# Altium PCB Balancing_Robot_1_1.PcbDoc (part 3 of 3)
Units mm, origin at the board's own origin, x right, y up, seen from the top; angles counter-clockwise.
Board outline 27 x 60 mm, 6 copper layers (Top Layer, Int1 (GND), Int2 (Sign), Int3 (Sign), Int4 (PWR), Bottom Layer), stack 1.571 mm thick; 139 components, 119 nets, 602 pads, 326 vias.
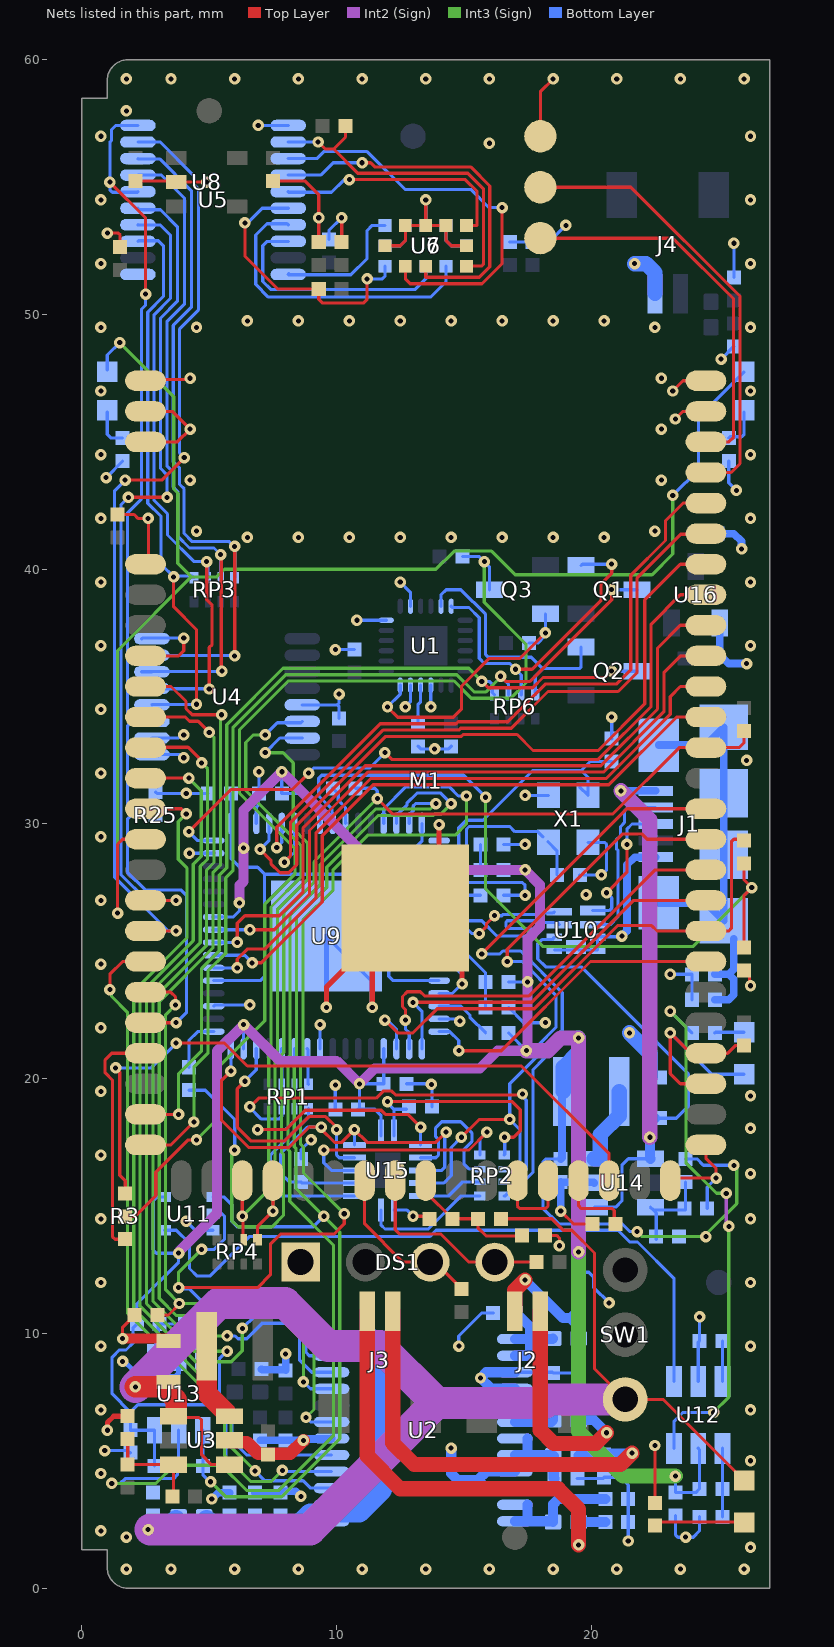
[diagram p6: the nets of this part, all layers, seen from the top]

## Via types
v1: diameter 0.45, hole 0.2, Top Layer to Bottom Layer, tented both sides, 326 vias

## Nets (pads, with @x,y where several pads share a name; then routed paths per layer and width w, separated by ;. In a path a pad name is that pad's centre, name@x,y a point inside that pad or via, vN(x,y) a via of type N, cw(c..) or ccw(c..) an arc to the next point about the centre after c; other vN are vias at no path point) (continued)
DEBUG_CTS: M1.47 U9.18 | length 16.3
  Top Layer w0.125: v1(12.7,22.3) 12.7,22.717 12.587,22.829 12.587,23.227 12.773,23.413 13.287,23.413 13.45,23.25 17.56,23.25 22.51,28.2 M1.47@24.5,28.2
  Bottom Layer w0.125: v1(12.7,22.3) 12.7,21.95 12.85,21.8 U9.18@12.85,21.175
DEBUG_RTS: M1.45 R14.1 U9.19 | length 21.1
  Top Layer w0.125: v1(11.9,22.3) 12.4,21.8 13,21.8 13.95,22.75 17.767,22.75 21.029,26.013 22.367,26.013 22.579,25.8 M1.45@24.5,25.8 25.4,25.8 25.5,25.9 25.5,29.3 25.6,29.4 25.95,29.4 R14.1@26,29.35 R14.1@26,29.4
  Bottom Layer w0.125: v1(11.9,22.3) 12,22.3 12.35,21.95 U9.19@12.35,21.175
DEBUG_RXD: M1.44 U9.16 | length 12.5
  Top Layer w0.125: v1(14.8,21.1) 16.47,21.1 19.97,24.6 M1.44@24.5,24.6
  Bottom Layer w0.125: U9.16@14.025,21.85 14.45,21.85 14.8,21.5 v1(14.8,21.1)
DEBUG_TXD: M1.46 U9.17 | length 15.1
  Top Layer w0.125: v1(13,23) 17.663,23 21.663,27 M1.46@24.5,27
  Bottom Layer w0.125: v1(13,23) 13.35,22.65 U9.17@13.35,21.175
F_3V3: C23.2 C24.2 C25.2 C32.2 C33.2 C34.2 C35.2 L2.2 L3.2 L4.2 R7.1 R11.1 R12.1 R13.1 R17.1 R22.1 U9.20 U9.31 U9.42 U9.50 U9.56 U11.5 U12.5 U13.6 U15.14 | length 128.1
  Int2 (Sign) w0.4: v1(3.8,13.15) 3.8,13.2 5.3,14.7 5.3,21.075 v1(6.35,22.125) 7.775,20.7 10,20.7 v1(10.9,19.8) 11.5,20.4 15.618,20.4 16.318,21.1 v1(17.45,21.1) 17.45,21.114 17.5,21.164 v1(17.5,23.8) 17.5,25.473 17.983,25.957 17.983,27.617 v1(17.4,28.2) 11.7,28.2 v1(7.85,32.05) 6.35,30.55 v1(6.35,29.05) 6.35,27.75 6.193,27.593 6.193,26.91 v1(6.183,26.9)
  Int2 (Sign) w0.6: v1(17.45,21.1) 18.3,21.1 18.8,21.6 v1(19.5,21.6) v1(19.5,13.2)
  Int3 (Sign) w0.125: v1(21.8,14) 22,13.8 v1(24.5,13.8) 24.5,13.883 25.713,15.096 25.713,16.487 v1(25.6,16.6)
  Int3 (Sign) w0.6: v1(19.5,13.2) 19.5,6.15 21.25,4.4 v1(23.3,4.4)
  Bottom Layer w0.125: R12.1@2.85,4.8 U13.6@2.85,6.2 1.922,6.2 C25.2@1.906,6.216 1.906,6.906 ; U11.5@3.25,15.35 2.95,15.35 2.8,15.2 2.8,13.275 2.925,13.15 v1(3.8,13.15) 3.8,12.8 2.156,11.156 R11.1@2.156,10.366 2.012,10.222 2.012,9.629 1.733,9.35 1.467,9.35 1.187,9.071 1.187,7.625 1.906,6.906 ; U9.42@5.15,26.35 U9.42@5.175,26.35 5.95,26.35 6.183,26.583 v1(6.183,26.9) ; R13.1@5.65,4.8 5.65,6.75 5.2,7.2 2.2,7.2 1.906,6.906 ; U9.31@6.35,21.175 v1(6.35,22.125) ; v1(6.35,29.05) U9.50@6.35,30.025 ; v1(7.85,32.05) C33.2@7.85,31.2 8.7,31.2 9.35,30.55 U9.56@9.35,30.025 ; U15.14@11.75,17.75 U15.14@11.75,17.95 11.75,18.55 11.5,18.8 C35.2@10.85,18.8 10.9,18.85 v1(10.9,19.8) C32.2@11.85,19.8 U9.20@11.85,21.175 ; L2.2@16.55,28.2 v1(17.4,28.2) ; R7.1@16.75,21.8 v1(17.45,21.1) ; L3.2@16.75,23.8 v1(17.5,23.8) ; C24.2@18.8,16.85 18.223,16.85 18.1,16.727 18.1,14.917 18.717,14.3 21.204,14.3 21.504,14 v1(21.8,14) ; v1(23.3,4.4) C34.2@23.3,3.75 24.1,3.75 R17.1@24.25,3.9 24.25,5.44 U12.5@24.2,5.49 ; C23.2@23.45,13.8 v1(24.5,13.8) ; R22.1@23.7,16.85 24.15,16.85 24.4,16.6 v1(25.6,16.6)
  Bottom Layer w0.3: C24.2@18.8,16.85 18.85,16.9 18.85,19.45 L4.2@18.9,19.5
  Bottom Layer w0.6: L4.2@18.9,19.5 18.9,20.45 19.5,21.05 v1(19.5,21.6)
FT_EECLK: R13.2 U9.62 U11.1 U13.4 | length 46.5
  Int3 (Sign) w0.125: v1(5.056,4.175) 5.644,3.587 7.841,3.587 10.125,5.871 10.125,13.975 v1(9.5,14.6) 8.413,15.687 8.413,17.251 8.337,17.326 8.337,20.73 8.427,20.82 8.427,26.327 9.613,27.513 9.613,28.305 11.645,30.337 13.804,30.337 13.854,30.388 14.088,30.388 v1(14.5,30.8)
  Bottom Layer w0.125: U13.4@4.75,6.2 R13.2@4.75,4.8 4.75,4.45 5.025,4.175 v1(5.056,4.175) ; U11.1@5.15,15.35 5.587,15.35 5.887,15.05 5.887,14.4 6.1,14.187 9.087,14.187 v1(9.5,14.6) ; U9.62@12.35,30.025 12.35,30.325 12.762,30.737 12.762,30.815 13.159,31.213 14.087,31.213 14.483,30.817 14.483,30.8 v1(14.5,30.8)
FT_EECS: R12.2 U9.63 U13.5 | length 45.8
  Int3 (Sign) w0.125: v1(1.175,4.112) 2.912,4.112 3.625,4.825 5.478,4.825 6.466,3.837 7.737,3.837 9.875,5.975 9.875,13.471 8.163,15.184 8.163,17.147 8.087,17.222 8.087,20.834 8.177,20.923 8.177,26.43 9.363,27.616 9.363,28.409 11.541,30.587 13.687,30.587 v1(13.9,30.8)
  Bottom Layer w0.125: v1(1.175,4.112) 1.512,4.112 1.7,4.3 3.6,4.3 3.75,4.45 R12.2@3.75,4.8 3.8,4.8 3.9,4.9 3.8,5 U13.5@3.8,6.2 ; U9.63@12.85,30.025 12.85,30.359 13.012,30.52 13.012,30.712 13.1,30.8 v1(13.9,30.8)
FT_EEDATA: R10.2 U9.61 U11.2 U13.3 | length 42.5
  Top Layer w0.125: v1(3.8,11.8) 6.9,11.8 7.4,12.3 7.4,13.5 7.8,13.9 9.9,13.9 10.3,14.3 v1(10.3,14.7)
  Int3 (Sign) w0.125: v1(3.8,11.8) 3.8,12.4 v1(4.7,13.3) ; v1(10.3,14.7) 8.7,16.3 8.7,17.317 8.587,17.429 8.587,20.627 8.677,20.716 8.677,26.223 9.863,27.409 9.863,28.202 11.223,29.563 14.663,29.563 15.1,30 v1(15.1,31.1)
  Bottom Layer w0.125: v1(3.8,11.8) 3.852,11.748 4.213,11.748 4.956,11.004 R10.2@4.956,10.366 ; v1(4.7,13.3) 5.2,13.3 5.6,13.7 5.6,14.6 5.5,14.7 U11.2@5.15,14.7 ; U13.3@4.75,9.05 4.9,9.2 R10.2@4.9,10.222 ; U9.61@11.85,30.025 11.85,30.59 12.722,31.463 14.421,31.463 14.783,31.1 v1(15.1,31.1)
FT_RESET: R7.2 U9.14 | length 2.3
  Bottom Layer w0.125: U9.14@14.025,22.85 14.885,22.85 15.235,22.5 15.235,22.415 R7.2@15.85,21.8
GND: 1.1 C1.1 C2.1 C3.1 C4.1 C5.1 C6.1 C7.1 C8.1 C9.1 C10.1 C11.1 C12.1 C13.1 C14.1 C15.1 C16.1 C17.1 C18.1 C20.1 C21.1 C22.1 C24.1 C25.1 C26.1 C27.1 C28.1 C29.1 C30.1 C31.1 C32.1 C33.1 C34.1 C35.1 C36.1 C37.1 C38.1 C39.1 C40.1 C41.1 C42.1 C43.1 C44.1 C45.1 C46.1 C47.1 C48.1 C49.1 C50.1 C51.1 C52.1 D2.1 DS1.1 J1.5 J4.1 M1.1 M1.4 M1.37 M1.38 M1.40 M1.41 M1.62 M1.63 M1.64 M1.65 M1.66 M1.67 R2.2 R5.2 R8.2 R9.2 R15.2 R16.2 R18.2 R20.2 R21.2 R23.2 R25.1 R28.2 R29.2 R32.2 R33.2 R34.2 U1.9 U1.11 U1.18 U1.20 U2.3 U2.4 U2.9 U2.10 U2.18 U3.2 U4.1 U4.2 U4.8 U4.13 U5.11 U6.2 U6.3 U6.4 U6.6 U6.12 U7.2 U7.3 U7.4 U7.6 U7.12 U8.2 U9.1 U9.5 U9.10 U9.11 U9.13 U9.15 U9.25 U9.35 U9.47 U9.51 U9.65 U10.3 U10.4 U10.5 U10.9 U11.3 U12.2 U13.2 U14.2 U15.7 U16.1 X1.2 X1.4 | length 194.1
  Top Layer w0.125: v1(1,53.2) 1.427,53.2 1.5,53.127 C11.1@1.5,52.65 ; C2.1@1.4,42.15 2.05,42.15 2.2,42 v1(2.6,42) 2.613,41.987 2.613,40.313 M1.1@2.5,40.2 ; v1(1.6,9.8) 1.6,10.25 R32.2@2.075,10.725 ; C16.1@2.1,55.25 3.65,55.25 U8.2@3.7,55.2 v1(4.9,55.2) ; M1.4@2.5,36.6 3.8,36.6 4,36.8 v1(4,37.3) ; M1.64@2.5,45 3.75,45 v1(4.25,45.5) 3.55,46.2 M1.65@2.5,46.2 ; M1.66@2.5,47.4 2.55,47.45 4.2,47.45 v1(4.25,47.5) ; C17.1@7.5,55.25 8.75,55.25 9.3,54.7 v1(9.3,53.8) C15.1@9.3,52.85 ; C14.1@10.2,52.85 v1(10.2,53.8) ; U7.12@11.9,52.7 12.5,52.7 12.7,52.9 U7.2@12.7,53.5 U7.3@13.5,53.5 ; v1(13,14.6) 13.55,14.6 R2.2@13.65,14.5 ; v1(13.5,54.5) U7.3@13.5,53.5 ; U7.6@15.1,52.7 14.5,52.7 14.3,52.9 U7.4@14.3,53.5 U7.3@13.5,53.5 ; 1.1@18,57 18,58.75 v1(18.5,59.25) ; C38.1@18.175,13.85 18.637,13.85 18.75,13.737 v1(18.75,13.442) ; v1(18.8,14.8) 19.3,14.3 R29.2@20.05,14.3 ; R28.2@22.5,3.35 v1(22.5,5.6) ; v1(22.75,45.5) v1@22.8,45.5 ; v1(22.75,47.5) v1@22.8,47.45 ; M1.37@23.1,16 23.2,16.1 v1(24.9,16.1) 24.9,16.475 24.5,16.875 M1.38@24.5,17.4 ; v1(23.2,47) 23.6,47.4 M1.63@24.5,47.4 M1.63@24.45,47.45 ; v1(23.3,45.9) 23.6,46.2 M1.62@24.5,46.2 ; M1.40@24.5,19.8 23.5,19.8 23.1,20.2 v1(23.1,21.8) 23.9,21 M1.41@24.5,21 25.35,21 25.65,21.3 C1.1@26,21.3 ; R15.2@26,24.25 26.212,24.037 26.212,23.688 v1(26.25,23.65)
  Top Layer w0.2: v1(1,6.2) 1,6.5 1.25,6.75 R5.2@1.8,6.75 ; v1(9.6,22.8) 9.6,23.6 M1.67@11.4,25.4 ; v1(11.4,22.8) M1.67@11.4,25.4 ; v1(14.025,29.975) 14.025,28.025 M1.67@12.7,26.7 ; v1(14.925,23.725) 14.925,24.475 M1.67@12.7,26.7 ; M1.67@11.4,25.4 M1.67@12.7,26.7
  Top Layer w0.4: v1(1.6,9.8) 3.3,9.8 C18.1@3.4,9.7
  Top Layer w0.5: U3.2@5.8,5.8 5.875,5.725 6.475,5.725 6.925,5.275 7.275,5.275 C20.1@7.3,5.25 7.325,5.275 8.175,5.275 v1(8.7,5.8)
  Bottom Layer w0.125: v1(0.9,5.4) 1.79,5.4 1.89,5.3 C25.1@1.906,5.316 ; v1(0.95,43.6) R33.2@1.6,44.25 ; U4.8@2.35,37.275 2.375,37.3 v1(4,37.3) ; U4.1@2.75,32.725 3.875,32.725 v1(4,32.6) ; U4.2@2.75,33.375 3.787,33.375 3.912,33.5 v1(4,33.5) ; R25.1@2.9,31.25 2.95,31.2 v1(4.1,31.2) C30.1@4.95,31.2 ; v1(4.1,14.4) 4.45,14.05 U11.3@5.15,14.05 ; v1(4.225,28.85) U9.47@5.175,28.85 ; U9.35@5.175,22.85 5.225,22.9 v1(6.6,22.9) ; U9.51@6.85,30.025 6.85,30.65 6.925,30.725 6.925,31.175 C33.1@6.95,31.2 v1(6.95,32.05) ; v1(6.925,57.425) U5.11@8.1,57.425 ; R21.2@8.6,16.85 8.6,17.2 v1(9,17.6) ; U4.13@8.65,34.675 10.025,34.675 ; U9.25@9.35,21.175 v1(9.35,22.125) ; U9.65@9.6,25.6 U9.65@11.4,23.8 ; C21.1@9.7,52.95 9.7,53.3 v1(10.2,53.8) ; C35.1@9.95,18.8 v1(9.95,19.75) ; v1(9.95,36.85) C9.1@10.7,36.85 ; C10.1@10.1,34.15 10.098,34.152 10.098,34.602 10.025,34.675 ; v1(10.1,35.1) 10.1,34.75 10.025,34.675 ; v1(10.8,38) U1.18@11.95,38 ; U6.6@11.9,52.7 12.5,52.7 12.7,52.9 U6.4@12.7,53.5 U6.3@13.5,53.5 ; U15.7@12.25,14.85 12.75,14.85 v1(13,14.6) ; v1(12.5,39.5) 12.9,39.1 U1.20@12.9,38.55 ; v1(12.7,34.6) 12.9,34.8 U1.11@12.9,35.45 ; C32.1@12.75,19.8 13.7,19.8 13.75,19.75 R20.2@13.75,18.9 ; C8.1@13.2,33.05 13.3,32.95 v1(13.85,32.95) 14.4,32.95 C7.1@14.5,33.05 ; v1(13.5,54.5) U6.3@13.5,53.5 ; v1(13.7,34.6) U1.9@13.7,35.45 ; U9.15@14.025,22.35 14.802,22.35 14.842,22.31 v1(14.842,22.258) ; U9.13@14.025,23.35 14.55,23.35 v1(14.925,23.725) 14.925,24.075 14.65,24.35 ; U9.11@14.025,24.35 14.65,24.35 ; U9.10@14.025,24.85 14.65,24.85 14.8,24.7 14.8,24.5 14.65,24.35 ; U9.5@14.025,27.35 14.75,27.35 15.1,27.7 17.3,27.7 17.4,27.6 v1(17.4,27.2) R8.2@16.55,27.2 ; U9.1@14.025,29.35 v1(14.025,29.975) ; v1(14.8,9.5) 14.8,9.9 15.7,10.8 C39.1@16.15,10.8 ; U6.12@15.1,52.7 14.5,52.7 14.3,52.9 U6.2@14.3,53.5 U6.3@13.5,53.5 ; C31.1@16.55,29.2 v1(17.4,29.2) ; C28.1@16.75,22.8 17.35,22.2 v1(18.2,22.2) ; C13.1@16.8,52.85 C12.1@17.7,52.85 18.35,52.85 v1(19,53.5) ; U2.3@17,8.475 18.475,8.475 C41.1@18.5,8.45 C42.1@19.5,8.45 ; v1(17.4,31.125) X1.2@18.325,31.125 ; U10.5@18.55,25.05 19.28,25.05 U10.9@19.4,25.17 19.52,25.05 U10.4@20.25,25.05 U10.3@20.25,25.55 20.275,25.575 v1@21.175,25.575 ; C45.1@19.45,4.3 20.45,4.3 C46.1@20.5,4.35 21.15,4.35 21.45,4.05 C43.1@21.45,3.5 C44.1@21.45,2.6 v1(21.45,1.85) ; C40.1@19.5,12.45 19.55,12.4 19.9,12.4 20.1,12.2 20.1,11.8 v1(20.7,11.2) ; C27.1@19.55,28 v1(20.4,28) 20.6,28.2 20.6,29.2 20.525,29.275 X1.4@19.875,29.275 ; C26.1@20.8,33.35 v1(20.8,34.2) ; v1(23.1,21.8) 24.725,20.175 D2.1@26,20.175 ; v1(23.1,24.1) R9.2@23.95,24.1 C29.1@23.95,23.1 ; C34.1@23.3,2.85 23.3,2.1 23.4,2 v1(23.7,2) 24,2 24.25,2.25 R18.2@24.25,2.8 ; U12.2@24.2,8.11 24.2,9.65 R16.2@24.25,9.7 v1(24.25,10.65) ; R23.2@24.55,14.9 24.55,15.75 v1(24.9,16.1) ; v1(25.1,48.25) C48.1@25.6,48.75 ; R34.2@25.4,44.25 25.4,43.4 v1(25.7,43.1) ; C47.1@25.6,51.45 v1(25.6,52.8)
  Bottom Layer w0.2: v1(1.6,8.9) 1.668,8.9 1.998,8.569 2.187,8.569 2.457,8.3 3.65,8.3 3.8,8.45 U13.2@3.8,9.05 ; v1(9.6,22.8) U9.65@9.6,25.6 ; v1(11.4,22.8) U9.65@11.4,23.8
  Bottom Layer w0.3: v1(5.1,3.5) 5.35,3.75 C50.1@5.8,3.75 ; C6.1@6.8,3.75 C5.1@7.8,3.75 7.85,3.7 7.85,3.725 7.925,3.8 8.4,3.8 v1(8.6,3.6) ; C4.1@7,5.8 C3.1@8,5.8 v1(8.7,5.8) 8.741,5.8 8.796,5.856 9.781,5.856 U2.18@9.8,5.875 ; C51.1@7.05,8.6 7.075,8.575 7.975,8.575 C52.1@8,8.55 v1(8,9.2) ; v1(18.8,14.8) C24.1@18.8,15.95 18.821,15.929 20.099,15.929 U14.2@20.12,15.908 ; v1(21.2,25.6) 21.4,25.8 21.4,28.4 21.7,28.7 J1.5@22.525,28.7 ; C37.1@24.55,36.5 24.9,36.5 25.05,36.65 ; C36.1@24.95,41.4 25.6,41.4 25.9,41.1 v1(25.9,40.8) ; U16.1@25.05,37.9 25.05,36.65 ; v1(26.1,36.3) 25.4,36.3 25.05,36.65
  Bottom Layer w0.4: v1(14.5,5.5) 14.5,4.5 14.75,4.25 15.55,4.25 ; U2.10@17,3.925 15.875,3.925 15.55,4.25 ; U2.9@17,4.575 15.875,4.575 15.55,4.25 ; U2.4@17,7.825 16.075,7.825 v1(15.65,8.25) 15.875,8.475 U2.3@17,8.475
  Bottom Layer w0.6: v1(21.5,21.8) 22.325,20.975 C22.1@22.325,20.075 ; v1(21.7,52) 22.149,52 22.5,51.649 J4.1@22.5,50.825
  other v1: 1.75,0.75 3.5,0.75 6,0.75 8.5,0.75 11,0.75 13.5,0.75 16,0.75 18.5,0.75 21,0.75 23.5,0.75 26,0.75 26.25,1.6 1.75,2 0.75,2.25 0.75,4.5 26.25,5 0.75,7 26.25,7 0.75,9.5 26.25,9.5 0.75,12 26.25,12 0.75,14.5 26.25,14.5 26.25,16.275 0.75,17 26.25,18.05 26.25,19.325 0.75,19.5 13.725,19.775 0.75,22 0.75,24.5 0.75,27 19.8,27.225 0.75,29.5 0.75,32 26.1,32.5 0.75,34.5 0.75,37 26.25,37 0.75,39.5 26.25,39.5 6.5,41.25 8.5,41.25 10.5,41.25 12.5,41.25 14.5,41.25 16.5,41.25 18.5,41.25 20.5,41.25 4.5,41.5 22.5,41.5 0.75,42 26.25,42 4.25,43.5 22.75,43.5 0.75,44.5 26.25,44.5 0.75,47 26.25,47 0.75,49.5 4.5,49.5 22.5,49.5 26.25,49.5 6.5,49.75 8.5,49.75 10.5,49.75 12.5,49.75 14.5,49.75 16.5,49.75 18.5,49.75 20.5,49.75 0.75,52 26.25,52 0.75,54.5 26.25,54.5 16,56.725 0.75,57 26.25,57 1.75,58 1.75,59.25 3.5,59.25 6,59.25 8.5,59.25 11,59.25 13.5,59.25 16,59.25 21,59.25 23.5,59.25 26,59.25
IMU_3V3_INT: Q3.3 R3.2 R27.2 | length 43.3
  Top Layer w0.125: R3.2@1.7,14.6 2.1,14.6 2.9,15.4 2.9,16.325 4.175,17.6 v1(4.5,17.6)
  Int3 (Sign) w0.125: v1(4.5,17.6) 5.2,18.3 5.2,20.3 7.177,22.277 7.177,26.845 8.362,28.03 8.362,29.038 6.187,31.213 6.187,33.697 8.103,35.613 14.615,35.613 15.29,34.937 16.837,34.937 17.438,35.538 17.438,37.062 15.8,38.7 v1(15.8,40.3)
  Bottom Layer w0.125: R27.2@14.95,40.5 15.6,40.5 v1(15.8,40.3) 16,40.1 Q3.3@16,39.2
IMU_INT: Q3.2 R26.2 U1.12 | length 11
  Top Layer w0.125: v1(12,34.6) 12,34.588 12.401,34.187 14.587,34.187 14.9,34.5 14.9,35.4 16,36.5 17.2,36.5 v1(18.2,37.5)
  Bottom Layer w0.125: v1(12,34.6) 12.5,35.1 U1.12@12.5,35.45 ; R26.2@17.55,37.1 17.9,37.1 18.2,37.4 v1(18.2,37.5) Q3.2@18.2,38.25
IMU_SCL: Q2.2 RP6.7 U1.23 | length 10.2
  Bottom Layer w0.125: U1.23@14.1,38.55 14.1,39 14.3,39.2 14.88,39.2 15.85,38.23 15.85,36.65 15.95,36.55 17.65,36.55 18.1,36.1 ; RP6.7@17.8,35.075 17.8,35.8 18.1,36.1 ; Q2.2@19.6,36.95 19.6,36.173 19.527,36.1 18.1,36.1
IMU_SDA: Q1.2 RP6.5 U1.24 | length 12.9
  Top Layer w0.125: v1(17.025,36.075) 17.675,36.075 20.387,38.787 20.387,39.437 20.8,39.85 v1(20.8,40.2)
  Bottom Layer w0.125: U1.24@14.5,38.55 14.5,38.535 14.535,38.5 15.2,38.5 15.6,38.1 15.6,36.5 15.8,36.3 16.8,36.3 17.25,35.85 RP6.5@17.25,35.075 ; Q1.2@19.6,40.15 19.65,40.2 v1(20.8,40.2)
IO0_TXD: 3.1 M1.60 | length 17.7
  Top Layer w0.125: 3.1@18,55 21.554,55 25.837,50.716 25.837,44.15 25.488,43.8 M1.60@24.5,43.8
IO1_TXD: 2.1 M1.61 | length 15.2
  Top Layer w0.125: 2.1@18,53 23.2,53 25.587,50.613 25.587,45.187 25.4,45 M1.61@24.5,45
M_IMU_INT: M1.17 R3.3 | length 9.4
  Top Layer w0.125: R3.3@1.6,13.8 R3.3@1.7,13.7 1.3,13.7 1.2,13.8 1.2,19.95 0.912,20.238 0.912,20.737 1.175,21 M1.17@2.5,21
MC_AIN1: M1.5 U2.21 | length 36.8
  Top Layer w0.125: M1.5@2.5,35.4 3.5,35.4 4.087,34.813 4.087,34.529 4.329,34.287 v1(5.487,34.287)
  Int3 (Sign) w0.125: v1(5.487,34.287) 5.437,34.237 5.437,28.384 5.146,28.092 5.146,25.132 3.037,23.023 3.037,11.377 3.714,10.7 7.8,10.7 8.7,9.8 v1(8.7,8.1)
  Bottom Layer w0.125: v1(8.7,8.1) 8.975,7.825 U2.21@9.8,7.825
MC_AIN2: M1.6 U2.22 | length 35.4
  Top Layer w0.125: M1.6@2.5,34.2 4.063,34.2 4.226,34.037 4.563,34.037 v1(5,33.6)
  Int3 (Sign) w0.125: v1(5,33.6) 5.187,33.413 5.187,28.487 4.896,28.196 4.896,25.235 2.787,23.127 2.787,11.273 4.161,9.9 v1(5.7,9.9)
  Bottom Layer w0.125: v1(5.7,9.9) 6.017,9.9 6.129,9.787 6.471,9.787 7.083,10.4 8,10.4 8.55,9.85 8.55,8.95 9.025,8.475 U2.22@9.8,8.475
MC_BIN1: M1.7 U2.17 | length 36.7
  Top Layer w0.125: M1.7@2.5,33 2.513,33.013 4.171,33.013 4.7,32.483 v1(4.7,32.4)
  Int3 (Sign) w0.125: v1(4.7,32.4) 4.937,32.163 4.937,28.626 4.646,28.334 4.646,25.339 2.537,23.23 2.537,11.17 4.407,9.3 v1(5.7,9.3)
  Bottom Layer w0.125: v1(5.7,9.3) 5.4,9 5.4,7.4 5.9,6.9 5.9,5.8 6.475,5.225 U2.17@9.8,5.225
MC_BIN2: M1.14 U2.16 | length 27.2
  Top Layer w0.125: v1(1.1,23.5) 1.1,24.1 1.6,24.6 M1.14@2.5,24.6
  Int3 (Sign) w0.125: v1(1.1,23.5) 1.162,23.438 1.162,23.238 1.787,22.613 1.787,10.813 5.6,7 5.6,5.217 6.629,4.187 7.438,4.187 v1(7.875,4.625)
  Bottom Layer w0.125: v1(7.875,4.625) 7.926,4.575 U2.16@9.8,4.575
MC_PWMA: M1.8 U2.23 | length 34.4
  Top Layer w0.125: M1.8@2.5,31.8 v1(4.2,31.8)
  Int3 (Sign) w0.125: v1(4.2,31.8) 4.687,31.313 4.687,28.729 4.375,28.417 4.375,25.421 2.287,23.334 2.287,11.066 4.466,8.887 5.871,8.887 6.3,9.317 v1(6.3,10.2)
  Bottom Layer w0.125: v1(6.3,10.2) 6.8,10.7 8.1,10.7 8.8,10 8.8,9.254 8.929,9.125 U2.23@9.8,9.125
MC_PWMB: M1.9 U2.15 | length 33.9
  Top Layer w0.125: M1.9@2.5,30.6 3.9,30.6 v1(4.1,30.4)
  Int3 (Sign) w0.125: v1(4.1,30.4) 3.787,30.087 3.787,28.613 4.125,28.275 4.125,25.525 2.037,23.437 2.037,10.963 5.85,7.15 5.85,5.55 v1(6.8,4.6)
  Bottom Layer w0.125: v1(6.8,4.6) 7.187,4.213 8.687,4.213 8.962,3.938 9.787,3.938 U2.15@9.8,3.925
MC_STBY: M1.15 R32.1 U2.19 | length 24.9
  Top Layer w0.125: M1.15@2.5,23.4 3.488,23.4 3.675,23.213 v1(3.675,22.9) ; R32.1@2.975,10.725 3,10.75 3.025,10.725 3.4,10.725 3.825,11.15 v1(3.825,11.175)
  Int3 (Sign) w0.125: v1(3.675,22.9) 3.287,22.512 3.287,11.713 v1(3.825,11.175) 7.679,11.175 9.113,9.741 9.113,7.013 v1(8.8,6.7)
  Bottom Layer w0.125: v1(8.8,6.7) 8.975,6.525 U2.19@9.8,6.525
MOTOR_A1: C39.2 L5.1 U2.1 U2.2 | length 4
  Bottom Layer w0.4: U2.2@17,9.125 U2.2@17.591,9.125 ; U2.1@17,9.775 U2.1@17.6,9.775 ; C39.2@17.05,10.8 17.6,10.25 U2.1@17.6,9.775 ; U2.2@17.6,9.125 U2.1@17.6,9.775 ; L5.1@18.5,9.8 18.475,9.775 U2.1@17.6,9.775
MOTOR_A1F: C40.2 J2.1 L5.2 | length 5.8
  Top Layer w0.6: J2.1@17,10.875 17,11.7 v1(17.4,12.1)
  Bottom Layer w0.4: v1(17.4,12.1) 18.9,10.6 19.2,10.6 ; L5.2@19.5,9.8 19.5,10.3 19.2,10.6 ; C40.2@19.5,11.55 19.5,10.9 19.2,10.6
MOTOR_A2: C41.2 L6.1 U2.5 U2.6 | length 3.1
  Bottom Layer w0.4: U2.6@17,6.525 18.425,6.525 L6.1@18.5,6.6 C41.2@18.5,7.55 ; U2.6@17.5,6.525 U2.5@17.5,7.175
MOTOR_A2F: C42.2 J2.2 L6.2 | length 9.9
  Top Layer w0.6: J2.2@18,10.875 18,6.199 18.524,5.675 20.175,5.675 v1(20.6,6.1)
  Bottom Layer w0.4: C42.2@19.5,7.55 L6.2@19.5,6.6 20.1,6.6 v1(20.6,6.1)
MOTOR_B1: C43.2 L7.1 U2.11 U2.12 | length 5
  Bottom Layer w0.4: U2.12@17,2.625 18.475,2.625 L7.1@18.5,2.6 18.5,3.3 18.7,3.5 C43.2@20.55,3.5 ; U2.12@17.5,2.625 U2.11@17.5,3.275
MOTOR_B1F: C44.2 J3.1 L7.2 | length 18.2
  Top Layer w0.6: J3.1@11.2,10.875 11.2,5.2 12.5,3.9 18.7,3.9 19.5,3.1 v1(19.5,1.7)
  Bottom Layer w0.4: v1(19.5,1.7) L7.2@19.5,2.6 C44.2@20.55,2.6
MOTOR_B2: C45.2 L8.1 U2.7 U2.8 | length 3.1
  Bottom Layer w0.4: U2.8@17,5.225 18.475,5.225 L8.1@18.5,5.2 18.525,5.175 18.525,4.325 C45.2@18.55,4.3 ; U2.8@17.5,5.225 U2.7@17.5,5.875
MOTOR_B2F: C46.2 J3.2 L8.2 | length 17.3
  Top Layer w0.6: J3.2@12.2,10.875 12.2,5.7 13.05,4.85 21.15,4.85 v1(21.6,5.3)
  Bottom Layer w0.4: L8.2@19.5,5.2 19.525,5.225 20.475,5.225 C46.2@20.5,5.25 20.54,5.29 21.59,5.29 v1(21.6,5.3)
NetC8_2: C8.2 U1.10 | length 1.5
  Bottom Layer w0.125: C8.2@13.2,33.95 13.2,34.7 13.3,34.8 U1.10@13.3,35.45
NetC19_1: C19.1 R4.2 R5.1 U3.6 | length 4.1
  Top Layer w0.125: R5.1@1.8,5.85 R4.2@1.8,4.85 U3.6@3.6,4.85 3.6,3.65 C19.1@3.55,3.6
NetC23_1: C23.1 R22.2 R23.1 U14.6 | length 3.7
  Bottom Layer w0.125: U14.6@22.32,14.958 U14.6@22.428,14.85 ; C23.1@22.55,13.7 22.55,14.728 U14.6@22.428,14.85 ; R22.2@23.7,15.95 23.7,14.85 U14.6@22.428,14.85
NetC26_2: C26.2 U9.2 X1.3 | length 10.3
  Bottom Layer w0.125: U9.2@14.025,28.85 14.55,28.85 14.8,29.1 14.8,29.854 15.096,30.15 15.75,30.15 17.7,32.1 19.6,32.1 ; X1.3@19.55,31.45 X1.3@19.875,31.125 19.875,31.825 19.6,32.1 ; C26.2@20.8,32.45 19.95,32.45 19.6,32.1
NetC27_2: C27.2 U9.3 X1.1 | length 6.9
  Bottom Layer w0.125: U9.3@14.025,28.35 14.65,28.35 15.1,28.8 15.1,29.8 15.2,29.9 16.8,29.9 17,29.7 17.9,29.7 X1.1@18.1,29.5 ; X1.1@18.3,29.3 X1.1@18.325,29.275 18.65,28.95 C27.2@18.65,28
NetC28_2: C28.2 L3.1 U9.9 | length 3.7
  Bottom Layer w0.125: U9.9@14.025,25.35 14.65,25.35 15.85,24.15 L3.1@15.85,23.8 C28.2@15.85,22.8
NetC29_2: C29.2 J1.6 J1.7 J1.8 J1.9 J1.10 J1.11 R9.1 | length 17
  Bottom Layer w0.3: J1.7@22.65,26.9 24.5,26.9 J1.9@25.2,26.2 J1.11@25.2,28.8 J1.10@25.2,31.2 J1.8@25.2,33.8 24.5,33.1 J1.6@22.65,33.1 ; C29.2@24.85,23.1 25.4,23.1 25.6,23.3 25.6,23.9 25.4,24.1 ; R9.1@24.85,24.1 25.4,24.1 ; J1.9@25.6,25.5 25.6,24.3 25.4,24.1
NetC30_2: C30.2 U9.12 U9.37 U9.49 U9.64 | length 23.7
  Bottom Layer w0.125: U9.37@5.175,23.85 7,23.85 7.175,24.025 7.175,28.025 ; C30.2@5.85,31.2 U9.49@5.85,30.025 5.85,28.65 6.2,28.3 6.9,28.3 7.175,28.025 ; U9.64@13.35,30.025 13.35,29.325 12.05,28.025 ; U9.12@14.025,23.85 12.225,23.85 12.05,24.025 12.05,28.025 ; 7.175,28.025 12.05,28.025
NetC31_2: C31.2 L2.1 U9.4 | length 2.8
  Bottom Layer w0.125: U9.4@14.025,27.85 14.75,27.85 15.1,28.2 L2.1@15.65,28.2 C31.2@15.65,29.2
NetC38_2: C38.2 M1.29 R1.2 R2.1 | length 5.2
  Top Layer w0.125: M1.29@13.5,16 13.5,15.55 R2.1@14.55,14.5 R1.2@15.55,14.5 15.55,14.15 15.875,13.825 17.075,13.825 C38.2@17.225,13.975
NetD1_1: D1.1 R28.1 | length 3.5
  Top Layer w0.125: R28.1@22.5,2.6 25.975,2.6 D1.1@26,2.575
NetD2_2: D2.2 R19.2 | length 1.2
  Bottom Layer w0.125: R19.2@24.85,21.8 24.875,21.825 D2.2@26,21.825
NetD3_1: D3.1 R33.1 | length 1.5
  Bottom Layer w0.125: D3.1@1,46.175 1,45.3 1.15,45.15 R33.1@1.6,45.15
NetD4_1: D4.1 R34.1 | length 1.5
  Bottom Layer w0.125: R34.1@25.4,45.15 25.45,45.2 25.9,45.2 26,45.3 D4.1@26,46.175
NetL1_1: L1.1 U3.3 | length 2.9
  Top Layer w0.8: L1.1@4.9,9.5 4.9,7.65 U3.3@5.65,6.9
NetL4_1: L4.1 U14.3 | length 3.2
  Bottom Layer w0.6: U14.3@20.12,16.858 20.35,16.858 20.35,17.8 21.1,18.55 L4.1@21.1,19.5
NetM1_32: M1.32 M1.33 | length 3.3
  Top Layer w0.125: M1.32@17.1,16 17.1,15 17.2,14.9 18.2,14.9 18.3,15 M1.33@18.3,16
NetM1_34: M1.34 R29.1 | length 3
  Top Layer w0.125: M1.34@19.5,16 19.5,15.012 19.612,14.9 20.827,14.9 20.9,14.827 20.9,14.35 R29.1@20.95,14.3
NetM1_35: M1.35 R3.1 | length 27.7
  Top Layer w0.125: v1(1.325,20.425) 1.488,20.262 1.488,16.212 1.7,16 R3.1@1.7,15.5 ; v1(3.7,21.4) 5.6,21.4 6.5,20.5 17.254,20.5 20.7,17.054 M1.35@20.7,16
  Bottom Layer w0.125: v1(1.325,20.425) 2.725,20.425 v1(3.7,21.4)
NetR6_1: R6.1 U9.58 | length 1.6
  Bottom Layer w0.125: R6.1@9.85,31.4 10.063,31.188 10.063,30.925 10.35,30.638 U9.58@10.35,30.025 U9.58@10.374,30.049
NetR8_1: R8.1 U9.6 | length 1.8
  Bottom Layer w0.125: U9.6@14.025,26.85 14.75,26.85 15.1,27.2 R8.1@15.65,27.2
NetR10_1: R10.1 R11.2 U13.1 | length 2.4
  Bottom Layer w0.125: U13.1@2.85,9.05 2.9,9.1 2.9,9.8 3,9.9 3,10.31 R11.2@3.056,10.366 R10.1@4.056,10.366
NetR16_1: R16.1 U12.3 | length 1.6
  Bottom Layer w0.125: U12.3@25.15,8.11 R16.1@25.15,9.7
NetR17_2: R17.2 R18.1 U12.4 | length 2.7
  Bottom Layer w0.125: R18.1@25.15,2.8 R17.2@25.15,3.9 U12.4@25.15,5.49
NetR19_1: R19.1 U12.6 | length 21.1
  Int2 (Sign) w0.125: v1(25.3,15.5) 25.3,14.3 v1(25.4,14.2)
  Int3 (Sign) w0.125: v1(23.1,22.65) 23.713,22.037 23.713,16.704 24.917,15.5 v1(25.3,15.5) ; v1(24.8,6.9) 25.4,7.5 v1(25.4,14.2)
  Bottom Layer w0.125: v1(23.1,22.65) R19.1@23.95,21.8 ; U12.6@23.25,5.49 23.25,6.55 23.6,6.9 v1(24.8,6.9)
NetR24_1: R24.1 U9.33 | length 2.2
  Bottom Layer w0.125: R24.1@4.2,20.45 4.2,21.5 4.55,21.85 U9.33@5.175,21.85
NetRP1_2: RP1.2 U9.26 | length 1.4
  Bottom Layer w0.125: U9.26@8.85,21.175 8.874,21.151 8.874,19.801 RP1.2@8.9,19.775
NetRP1_4: RP1.4 U9.27 | length 1.4
  Bottom Layer w0.125: RP1.4@8.35,19.775 U9.27@8.35,21.175
NetRP1_6: RP1.6 U9.28 | length 1.4
  Bottom Layer w0.125: RP1.6@7.85,19.775 U9.28@7.85,21.175
NetRP2_1: RP2.1 U15.8 | length 5.1
  Bottom Layer w0.125: U15.8@11.75,14.85 11.75,14.25 11.9,14.1 13.6,14.1 14.9,15.4 RP2.1@15.625,15.4
NetRP2_3: RP2.3 U15.6 | length 2.6
  Bottom Layer w0.125: U15.6@13.3,15.4 14.4,15.4 14.95,15.95 RP2.3@15.625,15.95
NetRP2_5: RP2.5 U15.3 | length 5.6
  Bottom Layer w0.125: U15.3@13.3,16.9 13.9,16.9 14,17 14,17.617 13.887,17.729 13.887,18.071 14.129,18.312 14.871,18.312 15.313,17.871 15.313,17.529 15,17.217 15,16.662 15.212,16.45 RP2.5@15.625,16.45
NetRP2_7: RP2.7 U15.11 | length 9.5
  Top Layer w0.125: v1(9.5,17.2) 15.2,17.2 v1(15.9,17.9)
  Bottom Layer w0.125: v1(9.5,17.2) 9.5,16.7 9.8,16.4 U15.11@10.7,16.4 ; RP2.7@15.625,17 15.625,17.625 v1(15.9,17.9)
NetU11_4: U11.4 U12.1 | length 26.9
  Bottom Layer w0.125: U11.4@3.25,14.05 3.708,14.05 4.225,13.533 4.225,12.55 4.525,12.25 5.025,12.25 6.575,13.8 13.654,13.8 13.904,14.05 21.05,14.05 21.513,13.587 21.813,13.587 23.25,12.15 U12.1@23.25,8.11
RECOVERY: R14.2 R15.1 U9.57 | length 28.5
  Top Layer w0.125: R15.1@25.962,25.188 R15.1@26,25.15 26,27.2 v1(26.3,27.5) 26,27.8 R14.2@26,28.45
  Int3 (Sign) w0.125: v1(15.85,31.05) 15.85,27.45 18.112,25.188 23.988,25.188 v1(26.3,27.5)
  Bottom Layer w0.125: U9.57@9.85,30.025 9.826,30.049 9.826,30.574 9.3,31.1 9.3,31.8 9.412,31.912 14.988,31.912 v1(15.85,31.05)
RECOVERY_CTS: M1.59 U9.53 | length 26.6
  Top Layer w0.125: v1(7.65,29.075) 7.65,29.875 11.712,33.937 14.691,33.937 14.766,34.013 16.72,34.013 18.207,35.5 21,35.5 21.55,36.05 21.55,39.767 22.913,41.129 22.913,41.913 23.6,42.6 M1.59@24.5,42.6
  Bottom Layer w0.125: v1(7.65,29.075) 7.85,29.275 U9.53@7.85,30.025
RECOVERY_RTS: M1.58 U9.54 | length 26.5
  Top Layer w0.125: v1(7.95,28.5) 8.187,28.737 8.187,30.055 11.82,33.687 14.795,33.687 14.87,33.763 16.863,33.763 18.3,35.2 21.054,35.2 21.8,35.946 21.8,39.663 23.512,41.376 24.476,41.376 M1.58@24.5,41.4
  Bottom Layer w0.125: v1(7.95,28.5) 8.35,28.9 U9.54@8.35,30.025
RECOVERY_RXD: M1.56 U9.48 | length 27.3
  Top Layer w0.125: v1@4.3,29.7 4.3,29.8 5.85,31.35 8.25,31.35 v1(8.9,32) ; v1(11.9,32.8) 12.162,32.538 20.273,32.538 22.35,34.614 22.35,37.85 23.5,39 M1.56@24.5,39
  Bottom Layer w0.125: v1(4.2,29.7) 4.55,29.35 U9.48@5.175,29.35 ; v1(8.9,32) 9.1,32.2 11.3,32.2 v1(11.9,32.8)
RECOVERY_TXD: M1.57 U9.52 | length 28
  Top Layer w0.125: v1(7,29) 7.421,28.579 7.421,28.446 7.779,28.088 8.121,28.088 8.437,28.404 8.437,29.952 11.923,33.437 14.898,33.437 14.973,33.513 17.087,33.513 17.712,32.888 20.27,32.888 22.1,34.718 22.1,38.8 23.5,40.2 M1.57@24.5,40.2
  Bottom Layer w0.125: v1(7,29) 7,29.008 7.35,29.358 U9.52@7.35,30.025
SCL0: M1.19 Q2.3 RP6.1 | length 35.9
  Top Layer w0.125: M1.19@2.5,18.6 v1(3.8,18.6) ; v1(15.7,35.6) 15.95,35.35 17.704,35.35 18.104,35.75 20.55,35.75 v1(20.8,36)
  Int3 (Sign) w0.125: v1(3.8,18.6) 3.8,20.2 4.7,21.1 4.7,24.332 5.396,25.028 5.396,27.989 5.687,28.28 5.687,33.904 7.896,36.113 15.187,36.113 v1(15.7,35.6)
  Bottom Layer w0.125: v1(15.7,35.6) 16,35.6 16.113,35.488 16.113,35.162 RP6.1@16.2,35.075 ; v1(20.8,36) Q2.3@21.8,36
SCL1: M1.23 RP4.3 U4.14 | length 25.4
  Top Layer w0.125: M1.23@6.3,16 v1(6.3,14.6) 6.325,14.575 6.325,13.7 RP4.3@6.35,13.675
  Int3 (Sign) w0.125: v1(6.3,14.6) 7.337,15.637 7.337,21.145 7.427,21.234 7.427,26.741 8.612,27.927 8.612,29.141 6.437,31.316 6.437,33.2 6.737,33.5 v1(7.2,33.5)
  Bottom Layer w0.125: v1(7.2,33.5) 7.675,33.975 8.6,33.975 U4.14@8.65,34.025
SCL2: DS1.3 M1.27 R31.2 | length 6.4
  Top Layer w0.125: M1.27@11.1,16 11.1,14.3 12.6,12.8 13.6,12.8 13.659,12.775 14.07,12.6 R31.2@14.85,11.82
SDA0: M1.20 Q1.3 RP6.3 | length 38.4
  Top Layer w0.125: M1.20@2.5,17.4 3.5,17.4 v1(4.4,18.3) ; v1@16.525,35.8 v1(16.438,35.8) 16.638,35.6 17.6,35.6 20.8,38.8 v1(20.8,39.2)
  Int3 (Sign) w0.125: v1(4.4,18.3) 4.4,20.446 4.95,20.996 4.95,24.229 5.646,24.925 5.646,27.885 5.937,28.177 5.937,33.801 7.999,35.863 14.719,35.863 15.394,35.187 15.871,35.187 16.438,35.754 v1(16.438,35.8)
  Bottom Layer w0.125: v1(16.438,35.8) 16.75,35.488 RP6.3@16.75,35.075 ; v1(20.8,39.2) Q1.3@21.8,39.2
SDA1: M1.24 RP4.1 U4.15 | length 23.9
  Top Layer w0.125: RP4.1@6.9,13.675 6.9,14.2 v1(7.5,14.8) M1.24@7.5,16
  Int3 (Sign) w0.125: v1(7.2,32.8) 7.9,32.8 8.3,32.4 8.3,29.807 8.863,29.245 8.863,27.823 7.677,26.637 7.677,21.13 7.587,21.041 7.587,15.534 7.5,15.446 v1(7.5,14.8)
  Bottom Layer w0.125: v1(7.2,32.8) 7.775,33.375 U4.15@8.65,33.375
SDA2: DS1.4 M1.28 R30.2 | length 8
  Top Layer w0.125: M1.28@12.3,16 12.3,14.075 12.475,13.9 14.1,13.9 15.2,12.8 DS1.4@16.21,12.8 R30.2@17.85,12.8
SERVICE_CTS: M1.55 U9.40 | length 27.8
  Top Layer w0.125: v1(6.1,25.35) 6.1,26.1 6.4,26.4 7.746,26.4 8.687,27.341 8.687,29.848 11.127,32.288 20.377,32.288 22.6,34.511 22.6,36.9 23.5,37.8 M1.55@24.5,37.8
  Bottom Layer w0.125: U9.40@5.15,25.35 U9.40@5.175,25.35 v1(6.1,25.35)
SERVICE_RTS: M1.54 U9.41 | length 26.1
  Top Layer w0.125: v1(6.6,25.85) 7.55,25.85 8.937,27.237 8.937,29.745 11.23,32.038 20.48,32.038 22.85,34.407 22.85,35.938 23.512,36.6 M1.54@24.5,36.6
  Bottom Layer w0.125: U9.41@5.15,25.85 U9.41@5.175,25.85 ; U9.41@5.2,25.85 v1(6.6,25.85)
SERVICE_RXD: M1.53 U9.38 | length 26
  Top Layer w0.125: v1(6.1,24.35) 6.1,24.7 6.487,25.087 7.187,25.087 9.187,27.087 9.187,29.641 11.334,31.788 20.584,31.788 23.1,34.304 23.1,35 23.5,35.4 M1.53@24.5,35.4
  Bottom Layer w0.125: U9.38@5.175,24.35 v1(6.1,24.35)
SERVICE_TXD: M1.52 U9.39 | length 25
  Top Layer w0.125: v1(6.687,24.55) 7.05,24.55 9.437,26.937 9.437,29.537 11.438,31.538 20.688,31.538 23.35,34.2 M1.52@24.5,34.2
  Bottom Layer w0.125: U9.39@5.15,24.85 U9.39@5.175,24.85 ; U9.39@5.187,24.85 6.387,24.85 v1(6.687,24.55)
STATUS_LED: D3.2 D4.2 M1.10 | length 58.3
  Top Layer w0.125: v1(1.4,26.5) 1.4,29.2 1.6,29.4 M1.10@2.5,29.4
  Int3 (Sign) w0.125: v1(1.4,26.5) 1.4,36.8 4.3,39.7 ; v1(1.488,48.9) 3.606,46.781 3.606,43.152 3.762,42.996 3.762,40.237 4.3,39.7 ; v1(23.2,42.9) 23.2,40.6 22.388,39.787 17.013,39.787 16.087,40.713 14.613,40.713 13.9,40 5.6,40 5.3,39.7 4.3,39.7
  Bottom Layer w0.125: D3.2@1,47.825 1,48.413 v1(1.488,48.9) ; v1(23.2,42.9) 24.212,43.912 24.212,45.962 D4.2@26,47.75
SWCLK: M1.49 RP2.2 | length 24.1
  Top Layer w0.125: v1(15.7,24.9) 21.4,30.6 M1.49@24.5,30.6
  Bottom Layer w0.125: v1(15.7,24.9) 16.417,24.9 16.529,25.013 17.224,25.013 18.863,23.374 18.863,21.909 18.15,21.196 18.15,20.796 17.712,20.359 17.712,16.321 17.029,15.637 16.862,15.637 16.625,15.4 RP2.2@16.575,15.4
SWCLK_F: RP1.1 U15.9 | length 7.2
  Bottom Layer w0.125: RP1.1@8.9,18.825 8.9,18.5 7.4,17 7.4,15.6 7.6,15.4 U15.9@10.7,15.4
SWD_EN: R21.1 U9.32 U15.4 U15.10 U15.13 | length 22.3
  Top Layer w0.125: v1(5.85,20.3) 5.487,19.938 5.487,18.359 6.546,17.3 8.117,17.3 8.917,18.1 v1(9.4,18.1) 9.4,18.017 9.917,17.5 10.2,17.5 v1(10.7,18) 11.2,17.5 13.9,17.5 v1(14.3,17.9)
  Bottom Layer w0.125: v1(5.85,20.3) U9.32@5.85,21.175 ; v1(9.4,18.1) 8.854,18.1 7.8,17.046 7.8,16.288 8.137,15.95 R21.1@8.6,15.95 8.65,15.9 U15.10@10.7,15.9 ; U15.13@10.7,17.4 v1(10.7,18) ; U15.4@13.3,16.4 14.127,16.4 14.25,16.523 14.25,17.85 v1(14.3,17.9)
SWDIO: M1.48 RP2.6 U15.5 | length 26.2
  Top Layer w0.125: v1(14.9,17.7) 15.6,18.4 v1(16.8,18.4) ; v1(16.7,24.6) 16.7,25.083 21.229,29.613 21.987,29.613 22.2,29.4 M1.48@24.5,29.4
  Bottom Layer w0.125: U15.5@13.3,15.9 14.2,15.9 14.5,16.2 14.5,17.3 v1(14.9,17.7) ; RP2.6@16.575,16.45 17.127,16.45 17.2,16.523 17.2,18 v1(16.8,18.4) 16.8,19.8 17.9,20.9 17.9,21.3 18.613,22.013 18.613,23.271 17.283,24.6 v1(16.7,24.6)
SWDIO_DIR: R20.1 RP2.8 U15.1 | length 9.6
  Top Layer w0.125: v1(12,19.1) 16.9,19.1 17.213,18.787 17.213,17.963 16.95,17.7 v1(16.6,17.7)
  Bottom Layer w0.125: v1(12,19.1) 12,19.05 12.25,18.8 ; U15.1@12.25,17.75 U15.1@12.25,17.95 12.25,18.8 ; R20.1@12.75,18.8 12.25,18.8 ; RP2.8@16.575,17 16.6,17.025 v1(16.6,17.7)
SWDIO_DIR_F: U9.30 U15.12 | length 9.9
  Top Layer w0.125: v1(6.4,19.9) 6.1,19.6 6.1,18.1 6.65,17.55 7.95,17.55 8.912,18.512 9.571,18.512 10,18.083 v1(10,18)
  Bottom Layer w0.125: v1(6.4,19.9) 6.85,20.35 U9.30@6.85,21.175 ; v1(10,18) 10,17 10.1,16.9 U15.12@10.7,16.9
SWDIO_IN_F: RP1.5 RP2.4 | length 17
  Top Layer w0.125: v1(6.6,18.9) 6.937,19.237 11.554,19.237 11.829,19.513 12.171,19.513 12.321,19.362 17.263,19.362 v1(17.3,19.4)
  Bottom Layer w0.125: v1(6.6,18.9) 6.6,18.86 7.047,18.412 7.737,18.412 7.85,18.525 RP1.5@7.85,18.825 ; RP2.4@16.575,15.95 16.582,15.957 16.988,15.957 17.45,16.42 17.45,19.162 17.3,19.312 v1(17.3,19.4)
SWDIO_OUT_F: RP1.3 U15.2 | length 9.7
  Top Layer w0.125: v1(6.9,18) 8,18 8.762,18.762 11.754,18.762 11.917,18.6 12.8,18.6 v1(13.3,18.1)
  Bottom Layer w0.125: v1(6.9,18) 7.975,18 8.35,18.375 RP1.3@8.35,18.825 ; U15.2@13.3,17.4 v1(13.3,18.1)
SYSRST_N: M1.51 R6.2 R24.2 R35.2 | length 44
  Top Layer w0.125: v1(11.6,31) 12.213,30.387 20.833,30.387 23.446,33 M1.51@24.5,33 25.8,33 26,33.2 R35.2@26,33.65
  Int3 (Sign) w0.125: v1(6,17.2) 5.887,17.087 5.887,14.429 6.129,14.187 7.471,14.187 7.913,14.629 7.913,17.043 7.837,17.118 7.837,20.937 7.927,21.027 7.927,26.534 9.113,27.72 9.113,28.513 v1(11.6,31)
  Bottom Layer w0.125: R24.2@4.2,19.55 4.85,19.55 6,18.4 v1(6,17.2) ; R6.2@10.75,31.4 11.5,31.4 11.6,31.3 v1(11.6,31)
TOF_NRESET: M1.16 R25.2 U4.3 U5.1 U5.6 U5.10 | length 44
  Top Layer w0.125: v1(1.1,55.2) 2.5,53.8 v1(2.5,50.8) ; M1.16@2.5,22.2 v1(3.7,22.2)
  Bottom Layer w0.125: U5.6@2.2,54.825 2.175,54.8 1.2,54.8 1.1,54.9 v1(1.1,55.2) 1.1,56.767 1.163,56.829 1.163,57.263 1.325,57.425 U5.10@2.2,57.425 ; U4.3@2.35,34.025 1.975,34.025 ; U5.1@2.5,51.5 v1(2.5,50.8) 2.5,50.363 2.337,50.2 2.337,42.754 1.787,42.204 1.787,34.213 1.975,34.025 ; R25.2@2.9,30.35 1.95,30.35 ; v1(3.7,22.2) 4.113,22.612 4.113,27.187 3.887,27.413 2.488,27.413 1.787,28.113 1.787,30.188 1.95,30.35 ; 1.95,30.35 1.787,30.513 1.787,33.838 1.975,34.025
USB_F_N: U9.7 U10.7 | length 7.6
  Bottom Layer w0.125: U9.7@14.025,26.35 14.706,26.35 14.856,26.2 15.7,26.2 16.3,25.6 17.6,25.6 17.698,25.698 17.698,25.802 17.6,25.9 16.723,25.9 16.65,25.973 16.65,26.15 16.7,26.2 18.1,26.2 18.163,26.137 18.663,26.137 U10.7@18.75,26.05
USB_F_P: U9.8 U10.8 | length 5
  Top Layer w0.125: v1(15.6,25.7) 15.892,25.992 15.892,26.092 v1(16.2,26.4)
  Bottom Layer w0.125: U9.8@14.025,25.85 15.15,25.85 15.3,25.7 v1(15.6,25.7) ; v1(16.2,26.4) 16.496,26.4 16.546,26.45 16.75,26.45 18.075,26.45 18.125,26.5 18.5,26.5 U10.8@18.55,26.55
USB_N: J1.2 U10.2 | length 6.7
  Bottom Layer w0.125: U10.2@20.05,26.05 20.75,26.05 21.05,26.35 21.05,28.8 21.05,28.967 20.987,29.029 20.987,29.387 21.15,29.55 21.15,29.904 21.3,30.054 21.3,30.5 21.45,30.65 J1.2@22.525,30.65
USB_P: J1.3 U10.1 | length 5.5
  Top Layer w0.125: v1(20.6,27.3) 21.4,28.1 v1(21.4,29.2)
  Bottom Layer w0.125: U10.1@20.05,26.6 20.7,26.6 20.8,26.7 20.8,27.1 v1(20.6,27.3) ; v1(21.4,29.2) 21.4,29.8 21.6,30 J1.3@22.525,30
VBAT: C18.2 C49.2 D1.2 L10.1 R1.1 SW1.3 U3.1 U3.4 | length 59.2
  Top Layer w0.125: 3.7,7.1 4.1,6.7 4.6,6.7 4.7,6.6 4.7,5.232 5.082,4.85 U3.1@5.8,4.85 ; R1.1@16.45,14.5 18.45,14.5 18.9,14.05 19.233,14.05 20.127,13.157 20.127,8.614 SW1.3@21.331,7.41 22.815,7.41 D1.2@26,4.225
  Top Layer w0.85: v1(2.1,7.9) 3.2,7.9 3.7,7.4 3.7,7.1
  Int2 (Sign) w1.25: v1(2.1,7.9) 5.4,11.2 7.971,11.2 9.671,9.5 11.7,9.5 13.925,7.275 ; v1@2.7,2.3 8.95,2.3 13.925,7.275 ; SW1.3@21.331,7.41 18.303,7.41 18.168,7.275 13.925,7.275
  Bottom Layer w0.75: v1(2.6,2.3) 3.3,2.3 L10.1@3.7,2.7
VBATF: C5.2 C6.2 C50.2 L10.2 U2.13 U2.14 U2.24 | length 15.4
  Bottom Layer w0.4: U2.24@9.8,9.775 11,9.775
  Bottom Layer w0.75: L10.2@4.9,2.7 5.3,2.3 8.3,2.3 8.95,2.95 10.9,2.95 11.8,3.85 11.8,9.45 11.475,9.775 11,9.775
VBUS: C22.2 J1.1 U10.6 U14.1 U14.4 | length 32.9
  Int2 (Sign) w0.6: v1(21.163,31.3) 22.3,30.162 v1(22.3,17.7)
  Bottom Layer w0.125: U10.6@18.55,25.55 18.463,25.463 18.063,25.463 17.9,25.3 17.9,24.7 18.208,24.392 19.15,24.392 19.608,24.392 23.813,20.187 23.813,18.924 23.338,18.45 C22.2@22.5,18.45 ; U14.1@20.12,14.958 20.958,14.958 21.2,15.2 21.2,16.6 21.458,16.858 U14.4@22.32,16.858
  Bottom Layer w0.3: v1(21.163,31.3) J1.1@22.525,31.3
  Bottom Layer w0.4: U14.4@22.32,16.858 22.31,16.868 22.31,17.69 v1(22.3,17.7) 22.31,17.71 22.31,18.375 22.385,18.45 C22.2@22.5,18.45
VL28_INT0: R37.2 U5.16 U6.7 | length 10.9
  Top Layer w0.125: v1(6.4,53.6) 6.4,52.3 7.7,51 R37.2@9.3,51 9.3,50.6 9.45,50.45 11.05,50.45 11.2,50.6 v1(11.2,51.4)
  Bottom Layer w0.125: v1@6.55,53.65 7.075,54.175 U5.16@8.1,54.175 ; v1(11.2,51.4) 11.8,51.4 11.9,51.5 U6.7@11.9,51.9
VL28_INT1: R36.2 U5.12 U7.7 | length 13.2
  Top Layer w0.125: v1(9.275,56.775) 9.55,56.5 9.883,56.5 ; R36.2@10.4,57.35 R36.2@10.35,57.4 10.35,56.967 9.883,56.5 ; U7.7@15.1,51.9 15.689,51.901 15.763,51.974 15.763,54.945 15.157,55.55 10.833,55.55 9.883,56.5
  Bottom Layer w0.125: U5.12@8.1,56.775 v1(9.275,56.775)
VL28_SCL0: U5.17 U6.10 | length 12
  Bottom Layer w0.125: U5.17@8.1,53.525 8.056,53.569 7.269,53.569 6.825,53.125 6.825,51.186 7.324,50.687 13.687,50.687 14.3,51.3 U6.10@14.3,51.9
VL28_SCL1: U5.13 U7.10 | length 16.3
  Top Layer w0.125: U7.10@12.7,51.9 12.7,51.4 12.888,51.212 15.708,51.212 16.5,52.004 v1(16.5,54.2)
  Bottom Layer w0.125: U5.13@8.1,56.125 9.225,56.125 9.5,56.4 11.2,56.4 12.687,54.913 15.271,54.913 15.983,54.2 v1(16.5,54.2)
VL28_SDA0: U5.18 U6.9 | length 9.7
  Bottom Layer w0.125: U5.18@8.1,52.875 7.275,52.875 7.1,52.7 7.1,51.3 7.413,50.987 13.087,50.987 13.5,51.4 U6.9@13.5,51.9
VL28_SDA1: U5.14 U7.9 | length 14.8
  Top Layer w0.125: v1(11.004,55.963) 11.337,55.963 11.5,55.8 15.261,55.8 16.013,55.048 16.013,51.871 15.604,51.462 13.5,51.462 U7.9@13.5,51.9
  Bottom Layer w0.125: U5.14@8.1,55.475 9.375,55.475 9.863,55.963 v1(11.004,55.963)
VL28_XS0: U5.20 U6.5 | length 5.3
  Bottom Layer w0.125: U5.20@8.125,51.6 U5.20@8.1,51.575 8.113,51.562 10.562,51.562 11.2,52.2 11.2,53.3 11.4,53.5 U6.5@11.9,53.5
VL28_XS1: U5.15 U7.5 | length 9.6
  Top Layer w0.125: v1(10.5,55.3) 15.054,55.3 15.513,54.841 15.513,53.5 U7.5@15.1,53.5
  Bottom Layer w0.125: U5.15@8.1,54.825 8.125,54.8 9.8,54.8 10.3,55.3 v1(10.5,55.3)
VL_INT0: M1.12 U5.5 | length 33.1
  Top Layer w0.125: v1(1.825,42.825) v1(3.35,42.825) ; M1.12@2.5,27 v1(3.7,27)
  Bottom Layer w0.125: v1(1.825,42.825) 1.537,42.537 1.537,28.009 2.546,27 v1(3.7,27) ; U5.5@2.2,54.175 2.262,54.113 3.087,54.113 3.75,53.45 3.75,50.517 3.087,49.854 3.087,43.959 3.337,43.709 3.337,42.837 v1(3.35,42.825)
VL_INT1: M1.13 U5.9 | length 37.2
  Top Layer w0.125: v1(1.7,43.5) 3.137,43.5 v1(4.019,44.381) ; M1.13@2.5,25.8 v1(3.7,25.8)
  Bottom Layer w0.125: v1(1.7,43.5) 1.287,43.087 1.287,27.905 3.393,25.8 v1(3.7,25.8) ; U5.9@2.2,56.775 3.082,56.775 4.4,55.457 4.4,55.117 4.575,54.942 4.575,50.175 3.837,49.437 3.837,44.563 v1(4.019,44.381)
VL_SCL0: RP3.3 U4.5 U5.4 | length 23.7
  Top Layer w0.125: v1(4.9,40.3) 4.9,38.8 5.113,38.587 5.113,37.044 5,36.931 v1(5,35.3)
  Bottom Layer w0.125: U5.4@2.2,53.525 2.213,53.512 3.088,53.512 3.475,53.125 3.475,50.631 2.837,49.993 2.837,42.699 3.363,42.174 3.363,41.347 4.41,40.3 v1(4.9,40.3) 4.95,40.25 RP3.3@4.95,39.675 ; U4.5@2.325,35.3 U4.5@2.338,35.312 ; U4.5@2.75,35.325 2.763,35.312 4.988,35.312 v1(5,35.3)
VL_SCL1: RP3.7 U4.7 U5.8 | length 27.6
  Top Layer w0.125: v1(6,36.6) v1(6,40.9)
  Bottom Layer w0.125: U5.8@2.2,56.125 2.213,56.112 3.051,56.112 4.3,54.863 4.3,50.289 3.587,49.576 3.587,44.225 3.837,43.975 3.837,43.329 4.013,43.154 4.013,41.404 4.329,41.087 5.787,41.087 5.975,40.9 v1(6,40.9) RP3.7@6,39.675 ; U4.7@2.35,36.625 U4.7@2.375,36.6 ; U4.7@2.75,36.625 2.763,36.612 5.987,36.612 v1(6,36.6)
VL_SDA0: RP3.1 U4.4 U5.3 | length 22.7
  Top Layer w0.125: v1(3.6,39.7) 3.6,38.525 4.5,37.625 v1(4.5,34.7)
  Bottom Layer w0.125: U5.3@2.2,52.875 2.225,52.9 3,52.9 3.2,52.7 3.2,50.709 2.587,50.097 2.587,42.596 3.113,42.071 3.113,40.187 v1(3.6,39.7) 3.633,39.733 4.342,39.733 RP3.1@4.4,39.675 ; U4.4@2.75,34.675 2.763,34.687 4.487,34.687 v1(4.5,34.7)
VL_SDA1: RP3.5 U4.6 U5.7 | length 26.6
  Top Layer w0.125: v1(5.45,40.575) 5.475,40.55 5.475,36.025 v1(5.5,36)
  Bottom Layer w0.125: U5.7@2.2,55.475 3.125,55.475 4.025,54.575 4.025,50.403 3.337,49.715 3.337,44.063 3.587,43.813 3.587,43.226 3.763,43.051 3.763,41.301 4.226,40.837 5.188,40.837 v1(5.45,40.575) RP3.5@5.45,39.675 ; U4.6@2.35,35.975 2.75,35.979 2.759,35.987 5.487,35.987 v1(5.5,36)
pads on no net: J1.4 J2. J3. J4. M1.11 M1.18 M1.21 M1.22 M1.25 M1.26 M1.30 M1.31 M1.36 M1.50 RP1.7 RP1.8 RP4.5 RP4.6 RP4.7 RP4.8 SW1.2 U1.1 U1.2 U1.3 U1.4 U1.5 U1.6 U1.7 U1.14 U1.15 U1.16 U1.17 U1.19 U1.21 U1.25 U3.5 U4.9 U4.10 U4.11 U4.12 U6.8 U7.8 U8.4 U9.21 U9.22 U9.23 U9.24 U9.29 U9.34 U9.36 U9.43 U9.44 U9.45 U9.46 U9.55 U9.59 U9.60 U14.5 U15.0

## Polygon pours and split planes (outlines as drawn)
GND on Top Layer "Top Layer-GND" (solid, pour order 0): 26.5,59.5 1.5,59.5 1.5,58 0.5,58 0.5,2 1.5,2 1.5,0.5 26.5,0.5
GND on Bottom Layer "Bottom Layer-GND" (solid, pour order 8): 26.5,59.5 1.5,59.5 1.5,58 0.5,58 0.5,2 1.5,2 1.5,0.5 26.5,0.5
GND on Int1 (GND) (split plane): 26.49,0.51 1.8,0.51 1.771,0.51 1.716,0.522 1.663,0.543 1.615,0.575 1.575,0.615 1.543,0.663 1.522,0.716 1.51,0.771 1.51,0.8 1.51,1.5 1.501,1.6 1.472,1.695 1.424,1.784 1.361,1.861 1.284,1.924 1.195,1.972 1.1,2.001 1,2.01 0.51,2.01 0.51,57.99 1,57.99 1.1,57.999 1.195,58.028 1.284,58.076 1.361,58.139 1.424,58.216 1.472,58.305 1.501,58.4 1.51,58.5 1.51,59.2 1.51,59.229 1.522,59.284 1.543,59.337 1.575,59.385 1.615,59.425 1.663,59.457 1.716,59.478 1.771,59.49 26.49,59.49
3V3 on Int4 (PWR) (split plane): 26.49,0.51 1.8,0.51 1.771,0.51 1.716,0.522 1.663,0.543 1.615,0.575 1.575,0.615 1.543,0.663 1.522,0.716 1.51,0.771 1.51,0.8 1.51,1.5 1.501,1.6 1.472,1.695 1.424,1.784 1.361,1.861 1.284,1.924 1.195,1.972 1.1,2.001 1,2.01 0.51,2.01 0.51,57.99 1,57.99 1.1,57.999 1.195,58.028 1.284,58.076 1.361,58.139 1.424,58.216 1.472,58.305 1.501,58.4 1.51,58.5 1.51,59.2 1.51,59.229 1.522,59.284 1.543,59.337 1.575,59.385 1.615,59.425 1.663,59.457 1.716,59.478 1.771,59.49 26.49,59.49

## Keep-outs
Keep-Out Layer:
  rectangle: 4.8,41.8 22.2,49.2
  lines w0.75: 0.946,0.8 ccw(c1.8,0.8) 1.8,-0.054 ; 0.946,59.2 cw(c1.8,59.2) 1.8,60.054

## Silkscreen, mask and mechanical layers (free items; w line width, h text height)
Top Overlay:
  rectangle: 19.5,50.5 25.5,57.5
  lines w0.1: 22.125,3.925 22.425,4.225 ; 22.125,4.525 22.425,4.225 ; 21.425,4.225 21.425,4.225 ; 21.425,4.225 22.425,4.225
  text "On" at 26.6,15.5 h1.2 r90
  text "W" at 0.5,14.875 h0.85
  text "G" at 0.5,13.475 h0.85
Bottom Overlay:
  lines w0.1: 7.9,31.8 7.6,31.8 ; 8.5,5.875 8.5,6.25 ; 8.875,6.25 8.5,6.25 ; 9.15,0.325 9.15,1.75 8.8,2.1 8.8,5.95 8.5,6.25 ; 9.5,32.2 8,32.2 7.6,31.8 ; 7.6,31.8 7.6,32.1 7.6,31.8 ; 0.5,11.3 0.5,27.2 2.5,27.2 2.5,11.3 0.5,11.3 ; 17.9,3.7 20,3.7 20,10.3 17.9,10.3 17.9,3.7
  text "G" at 2.125,30.6 h0.85
  text "V" at 2.125,29.225 h0.85
  text "P-B-ROBOT-1-1" at 0.9,12 h1.2 r270
Board Outline  (31) (Mech31):
  lines w0.1: 0,1.5 0,58.5 1,58.5 1,59.2 cw(c1.8,59.2) 1.8,60 27,60 27,33 27,0 1.8,0 cw(c1.8,0.8) 1,0.8 1,1.5 0,1.5